# Altium PCB GPS.PcbDoc
Units mm, origin at the board's own origin, x right, y up, seen from the top; angles counter-clockwise.
Board outline 28 x 20 mm, 2 copper layers (Top Layer, Bottom Layer), stack 0.871 mm thick; 39 components, 32 nets, 142 pads, 260 vias.
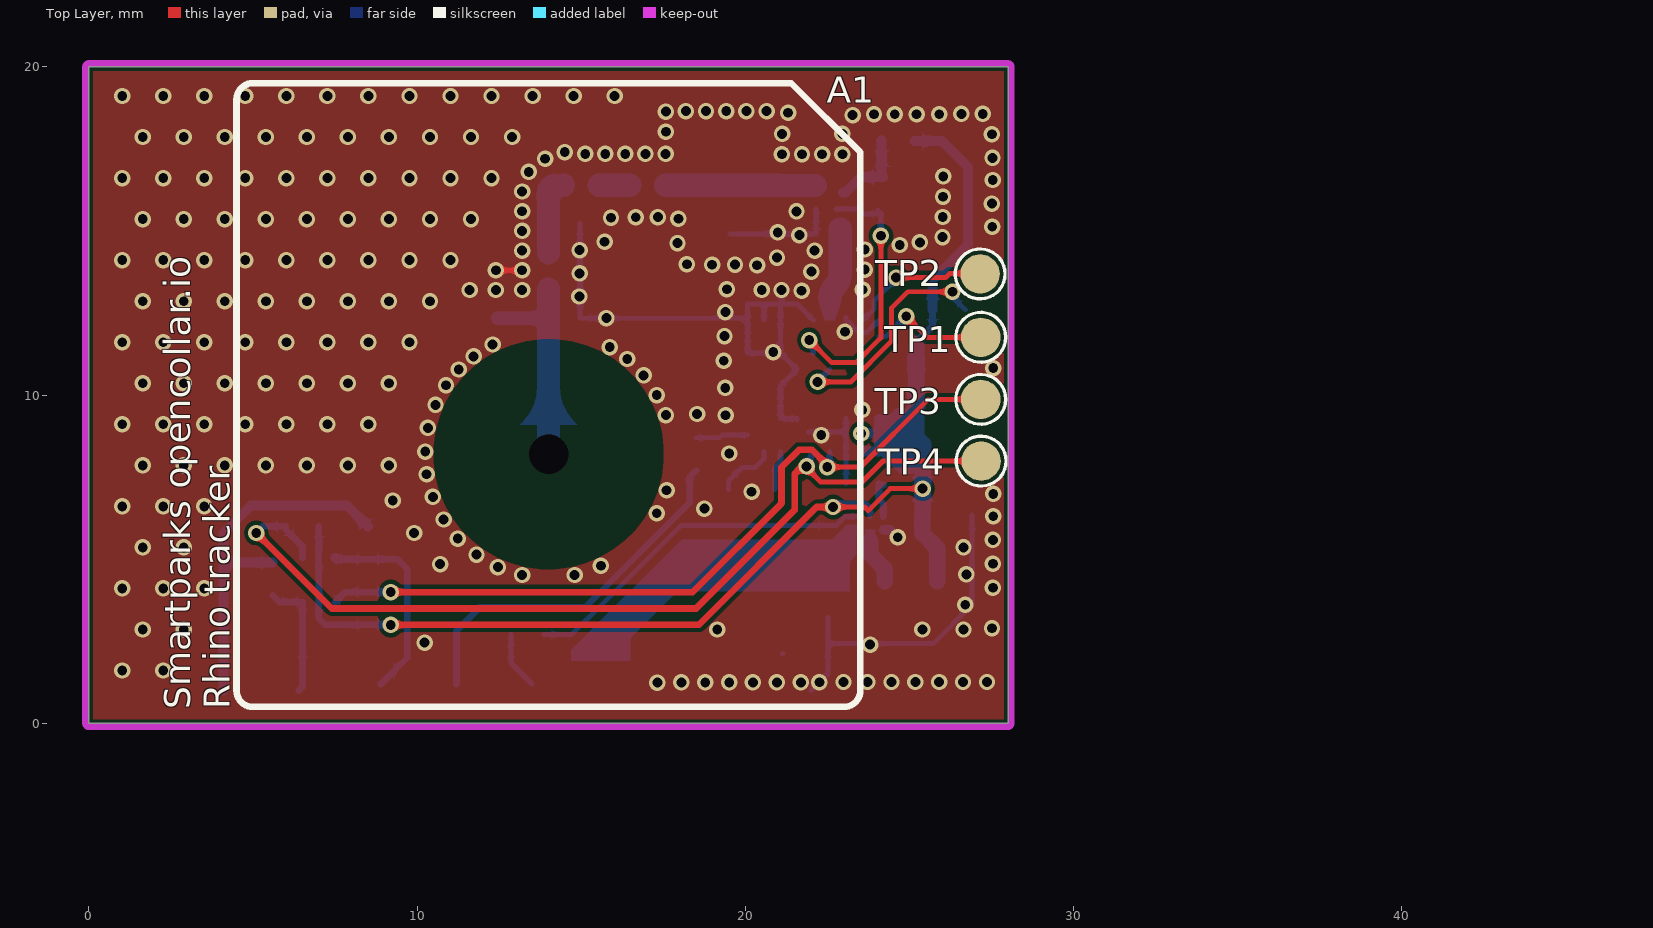
[diagram p0: Top Layer view]
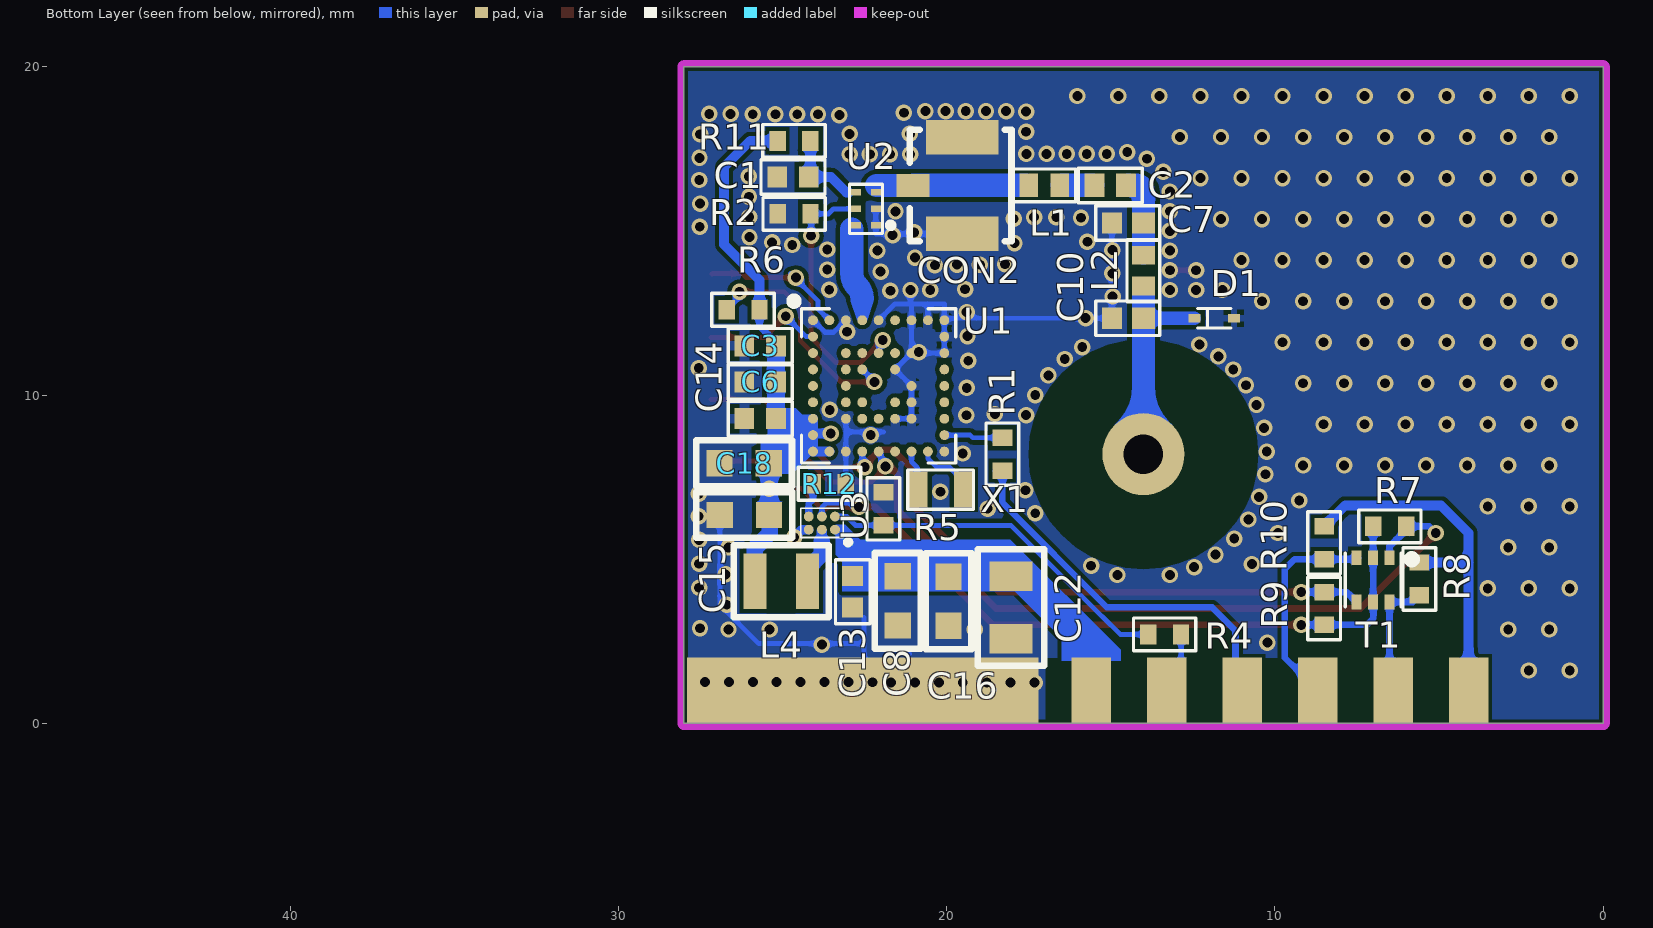
[diagram p1: Bottom Layer view, seen from below]

## Layer stack, top to bottom
Top Solder: solder mask 0.0102, Solder Resist, Dk 3.5
Top Layer: signal copper 0.0356
Dielectric 1: dielectric 0.8, FR-4, Dk 4.8
Bottom Layer: signal copper 0.0356
Bottom Solder: solder mask 0.0102, Solder Resist, Dk 3.5

## Board outline
0,0 0,20 28,20 28,0

## Design rules (kind name [scope] priority, off if disabled: settings)
Clearance Clearance_ANT [InComponent('A1')] p1: gap=2.24 ignorepadtopadclearanceinfootprint=TRUE
Clearance [All] p2: gap=0.127 ignorepadtopadclearanceinfootprint=FALSE
ComponentClearance ComponentClearance_CON [InComponent('CON1')] p1: gap=-100 collisioncheckmode=3 verticalgap=-100 showdistances=FALSE
ComponentClearance [All] p2: gap=0.254 collisioncheckmode=3 verticalgap=0.254 showdistances=FALSE
MinimumSolderMaskSliver [All] p1: minsoldermaskwidth=0.127
PlaneClearance [InComponent('A1')] p1: clearance=0.508
PolygonConnect [All] p1: thpad.connectstyle=Direct thpad.reliefconductorwidth=0.254 thpad.reliefentries=4 thpad.polygonreliefangle="90 Angle" thpad.airgapwidth=0.254 smdpad.connectstyle=Relief smdpad.reliefconductorwidth=0.3 smdpad.reliefentries=4 smdpad.polygonreliefangle="90 Angle" smdpad.airgapwidth=0.127 via.connectstyle=Direct via.reliefconductorwidth=0.254 via.reliefentries=4 via.polygonreliefangle="90 Angle" via.airgapwidth=0.254
RoutingVias [All] p1: holewidth=0.2 width=0.4 viastyle="Through Hole" minholewidth=0.2 minwidth=0.4 maxholewidth=1.5 maxwidth=2
SilkToSilkClearance [All] p1: silktosilkclearance=0
SilkToSolderMaskClearance [IsPad] p1: minsilkscreentomaskgap=0 clearancetoexposedcopper=TRUE
SolderMaskExpansion [All] p1: expansion=0.102
Width [All] p1: maxlimit=5 minlimit=0.127 preferedwidth=0.3
25 further rules are at their usual default settings.

## Classes and differential pairs
component class GPS_POWER: C8 C12 C13 C14 C15 C16 C18 L4 R4 R5 R12 U3
component class MAIN_GPS: R7 R8 R9 R10 T1
component class GPS: A1 C1 C2 C3 C6 C7 C10 CON2 D1 L1 L2 R1 R2 R6 R11 TP1 TP2 TP3 TP4 U1 U2 X1

## Components (designator, comment, footprint, x,y, rotation, side; value= is the part's Value field where it differs from the comment)
A1 "CGGP.18.2.A.02" CGGP.18.2.A.02 14,10 r180 top locked
C1 "33nF" CAP0402#1 24.681,16.642 r180 bottom
C2 "470pF" CAP0402#2 15.015,16.387 r180 bottom
C3 "1uF" CAP0402#1 25.68,11.5 r180 bottom
C6 "100nF" CAP0402#1 25.68,10.4 r180 bottom
C7 "?" CAP0402#3 14.484,15.24 r180 bottom
C8 "10uF" CAP0603 21.49,3.73 r90 bottom
C10 "?" CAP0402#3 14.484,12.34 r180 bottom
C12 "100uF" CAP0805 18.04,3.53 r90 bottom
C13 "100nF" CAP0402#1 22.86,4.01 r90 bottom
C14 "100nF" CAP0402#1 25.68,9.28 r180 bottom
C15 "22uF/4V" CAP0603 26.16,6.35 r180 bottom
C16 "10uF" CAP0603 19.94,3.72 r90 bottom
C18 "10uF" CAP0603 26.17,7.92 r180 bottom
CON2 "U.FL-R-SMT-1(10)" "ufl connector smd" 19.776,16.235 r90 bottom
D1 "ESD9R3.3ST5G" SOD-923 11.849,12.34 r0 bottom
L1 "6.8nH" IND0402 17.025,16.387 r180 bottom
L2 "?" IND0402 14.005,13.79 r270 bottom
L4 "2.2uH" IND2.3X1.7 25.04,4.326 r0 bottom
R1 "100R" RES0402 18.3,8.2 r90 bottom
R2 "100k" RES0402 24.646,15.519 r180 bottom
R4 "100R" RES0402 13.36,2.71 r0 bottom
R5 "1M" RES0402 21.925,6.534 r270 bottom
R6 "100k" RES0402 26.2,12.6 r180 bottom
R7 "100k" RES0402 6.5,6 r180 bottom
R8 "100k" RES0402 5.6,4.4 r90 bottom
R9 "100k" RES0402 8.5,3.5 r90 bottom
R10 "100k" RES0402 8.5,5.5 r90 bottom
R11 "0R" RES0402 24.648,17.742 r0 bottom
R12 "0R" RES0402 23.57,7.3 r180 bottom
T1 "NTZD3154NT1G" SOT-563 7.01,4.37 r0 bottom value=BSS123
TP1 "TestPoint" TestPoint:1.2x1.2mm 27.17,11.76 r180 top
TP2 "TestPoint" TestPoint:1.2x1.2mm 27.15,13.69 r180 top
TP3 "TestPoint" TestPoint:1.2x1.2mm 27.17,9.87 r90 top
TP4 "TestPoint" TestPoint:1.2x1.2mm 27.18,7.99 r90 top
U1 "Ublox ZOE-M8B" S-LGA51 22.07,10.28 r180 bottom
U2 "MAX2659" uDFN-6 22.456,15.672 r90 bottom
U3 "MAX38640AENT+" WLP-6 23.8,6.1 r0 bottom
X1 "9HT11-32.768KEZC-T" 9HT11 20.18,7.12 r0 bottom

## Footprints (in the part's own frame and the unit in brackets; to place one, negate y for a bottom-side part, rotate by r counter-clockwise, add the part's x,y. Pads: shape width x height; smd on the part's side, far side on the other; paste and mask are expansions set on the pad)
9HT11 [mm]
  rect 0.6x1.1 smd: 1(-0.7,0) 2(0.7,0)
  silkscreen extent -1,-0.6 1,0.6, body extent -1,-0.6 1,0.6, height 0.6
CAP0402#1 [mm] "Chip Capacitor, 2-Leads, Body 1.00x0.50mm, IPC Medium Density"
  rect 0.6x0.64 smd: 1(-0.48,0) 2(0.48,0)
  silkscreen extent -0.97,-0.53 0.97,0.53, body extent -0.55,-0.3 0.55,0.3, height 0.45
CAP0402#2 [mm] "Chip Capacitor, 2-Leads, Body 1.00x0.50mm, IPC Medium Density"
  rect 0.6x0.712 smd: 1(-0.48,0) 2(0.48,0)
  silkscreen extent -0.97,-0.53 0.97,0.53, body extent -0.55,-0.3 0.55,0.3, height 0.45
CAP0402#3 [mm] "Chip Capacitor, 2-Leads, Body 1.00x0.50mm, IPC Medium Density"
  rect 0.6x0.64 smd: 1(-0.48,0)
  rect 0.712x0.64 smd: 2(0.48,0)
  silkscreen extent -0.97,-0.53 0.97,0.53, body extent -0.55,-0.3 0.55,0.3, height 0.45
CAP0603 [mm]
  rect 0.8x0.8 smd: 1(-0.75,0) 2(0.75,0)
  silkscreen extent -1.46,-0.7 1.46,0.7, body extent -0.8,-0.4 0.8,0.4, height 0.9
CAP0805 [mm]
  rect 0.9x1.3 smd: 1(-0.95,0) 2(0.95,0)
  silkscreen extent -1.78,-1.02 1.78,1.02, body extent -1,-0.6 1,0.6, height 1.5
CGGP.18.2.A.02 [mm]
  round 0 / inner round 1.5 / far side round 2.5 hole 1.2: 1(-0.005,1.8)
  silkscreen extent -9.5,-9.5 9.5,9.5, body extent -9.5,-9.5 9.5,9.5, height 5.54
IND2.3X1.7 [mm]
  rect 0.7x1.7 smd: 1(-0.8,0) 2(0.8,0)
  silkscreen extent -1.45,-1.1 1.45,1.1, body extent -1,-0.8 1,0.8, height 0.95
IND0402 [mm] "Chip Inductor, 2-Leads, Body 1.00x0.50mm, IPC Medium Density"
  rect 0.57x0.712 smd: 1(-0.47,0) 2(0.47,0)
  silkscreen extent -0.95,-0.5 0.95,0.5, body extent -0.53,-0.28 0.53,0.28, height 0.55
RES0402 [mm] "Chip Resistor, 2-Leads, Body 1.00x0.50mm, IPC Medium Density"
  rect 0.5x0.6 smd: 1(-0.5,0) 2(0.5,0)
  silkscreen extent -0.95,-0.5 0.95,0.5, body extent -0.5,-0.25 0.5,0.25, height 0.35
S-LGA51 [mm]
  round 0.3 smd mask+0.05: A1(-2,2) A2(-1.5,2) A3(-1,2) A4(-0.5,2) A5(0,2) A6(0.5,2) A7(1,2) A8(1.5,2) A9(2,2) B1(-2,1.5) B9(2,1.5) C1(-2,1) C3(-1,1) C4(-0.5,1) C5(0,1) C6(0.5,1) C7(1,1) C9(2,1) D1(-2,0.5) D3(-1,0.5) D4(-0.5,0.5) D6(0.5,0.5) D9(2,0.5) E1(-2,0) E3(-1,0) E7(1,0) E9(2,0) F1(-2,-0.5) F3(-1,-0.5) F4(-0.5,-0.5) F6(0.5,-0.5) F7(1,-0.5) F9(2,-0.5) G1(-2,-1) G3(-1,-1) G4(-0.5,-1) G5(0,-1) G6(0.5,-1) G7(1,-1) G9(2,-1) H1(-2,-1.5) H9(2,-1.5) J1(-2,-2) J2(-1.5,-2) J3(-1,-2) J4(-0.5,-2) J5(0,-2) J6(0.5,-2) J7(1,-2) J8(1.5,-2) J9(2,-2)
  silkscreen extent -2.69,-2.35 2.35,2.69, body extent -2.25,-2.25 2.25,2.25, height 1.04
SOD-923 [mm]
  rect 0.36x0.25 smd: A(-0.6,0) K(0.6,0)
  silkscreen extent -0.5,-0.3 0.51,0.3, body extent -0.5,-0.3 0.5,0.3, height 0.4
SOT-563 [mm]
  rect 0.3x0.45 smd: 1(-0.5,-0.675) 2(0,-0.675) 3(0.5,-0.675) 4(0.5,0.675) 5(0,0.675) 6(-0.5,0.675)
  silkscreen extent -1.3,-0.81 0.85,0.82, body extent -0.8,-0.81 0.8,0.81, height 0.58
TestPoint:1.2x1.2mm [mm]
  round 1.2 smd paste-10 mask+0: 0(0,0)
  silkscreen extent -0.76,-0.76 0.76,0.76
uDFN-6 [mm]
  rect 0.2x0.3 smd: 1(-0.5,-0.3) 2(0,-0.3) 3(0.5,-0.3) 4(0.5,0.3) 5(0,0.3) 6(-0.5,0.3)
  silkscreen extent -0.75,-0.8 0.75,0.5, body extent -0.75,-0.5 0.75,0.5, height 0.75
"ufl connector smd" [mm]
  rect 0.712x1 smd: 1(0.15,1.248)
  rect 1.05x2.2 smd: 2(-1.325,-0.252) 2(1.625,-0.252)
  silkscreen extent -1.55,-1.75 1.85,1.35, body extent -1.55,-1.67 1.85,1.43, height 1.25
WLP-6 [mm] "WLP-6"
  round 0.3 smd mask+0.05: A1(-0.4,0.2) A2(0,0.2) A3(0.4,0.2) B1(-0.4,-0.2) B2(0,-0.2) B3(0.4,-0.2)
  silkscreen extent -0.86,-0.45 0.64,0.64, body extent -0.62,-0.42 0.62,0.42, height 1.27

## Part data
A1: library part "ANT - CGGP.18.2.A.02", "Antennas Passive GPS/GLONASS Patch Antenna", Manufacturer=Antenova, Manufacturer Part Number=SR42I010-R, Supplier Part Number 1=960-CGGP.18.2.A.02, ComponentLink1Description=Datasheet, ComponentLink1URL=D:\altium\Altium_Library\Passive\Datasheet\CGGP.18.2.A.02.pdf, Pricing 1="1 = 2.36000, 10 = 1.90000, 50 = 1.90000, 100 = 1.52000, 1000 = 1.07000, 10000 = 0.95900 (USD)", Stock 1=3154, Supplier 1=Mouser
C1: library part "C - 33pF/0402", "MULTICOMP         MC0402N330J160CT             SMD Multilayer Ceramic Capacitor, 0402 [1005 Metric], 33 pF, 16 V,  5%, C0G / NP0, MC Series                          New", Capacitance=33pF, Case Code (Imperial)=0402, Case Code (Metric)=1005, Dielectric=C0G, IRNAS Part No.=/, Manufacturer=Multicomp, Manufacturer Part Number=MC0402N330J160CT, Max Operating Temperature=125°C, Min Operating Temperature=-55°C, Supplier Part Number 1=1759384, Tolerance=5%, Voltage Rating=16V, ComponentLink1Description=http://www.farnell.com/datasheets/2117933.pdf, ComponentLink1URL=http://www.farnell.com/datasheets/2117933.pdf, ComponentLink2Description=http://www.farnell.com/datasheets/2117900.pdf, ComponentLink2URL=http://www.farnell.com/datasheets/2117900.pdf, Packaging="Cut Tape", Pricing 1="10=0.011, 100=0.009, 500=0.0069, 2500=0.0041 (EUR)", REACH SVHC="No SVHC", Stock 1=19597, Supplier 1=Farnell, Voltage Rating (DC)=16V
C2: library part "C - 470pF/0402", IRNAS Part No.=/, Manufacturer=Murata, Manufacturer Part Number=GRT155R71H471KE01D, Supplier Part Number 1=2672128, Pricing 1="10=0.0259, 100=0.0176, 500=0.0105, 2500=0.008, 5000=0.007, 10000=0.006, 50000=0.0041 (GBP)", Stock 1=11080, Supplier 1=Farnell
C3: library part "C - 1uF/0402", "CAP CER 1UF 10V 20% X5R 0402", Case/Package=0402, Case Code (Metric)=1005, Dielectric=X5R, IRNAS Part No.=/, Manufacturer=Murata, Manufacturer Part Number=GRM155R61A105ME15D, Max Operating Temperature=85°C, Min Operating Temperature=-55°C, Package Quantity=1, Supplier Part Number 1=1740588, Tolerance=20%, Voltage=10V, Capacitance=1uF, Case Code (Imperial)=0402, ComponentLink1Description=https://datasheet.ciiva.com/164/product-164665.pdf, ComponentLink1URL=https://datasheet.ciiva.com/164/product-164665.pdf, ComponentLink2Description=https://datasheet.ciiva.com/11616/product-11616508.pdf, ComponentLink2URL=https://datasheet.ciiva.com/11616/product-11616508.pdf, ComponentLink3Description=https://datasheet.ciiva.com/46418/1769893-46418047.pdf, ComponentLink3URL=https://datasheet.ciiva.com/46418/1769893-46418047.pdf, ComponentLink4Description=https://datasheet.ciiva.com/164/partnumbering-e-01-164666.pdf, ComponentLink4URL=https://datasheet.ciiva.com/164/partnumbering-e-01-164666.pdf, ComponentLink5Description=https://datasheet.ciiva.com/164/partnumbering-e-01-164667.pdf, ComponentLink5URL=https://datasheet.ciiva.com/164/partnumbering-e-01-164667.pdf, Depth=0.5mm, Height=0.5mm, Lead Free="Lead Free", Length=1mm, Mount="Surface Mount", Packaging="Tape and Reel", Pricing 1="10=0.0379, 100=0.0266, 500=0.0156, 2500=0.0098, 5000=0.0083 (EUR)", Radiation Hardening=No, REACH SVHC="No SVHC", Stock 1=0, Supplier 1=Farnell, Thickness=0.022inch, Voltage Rating=10V, Voltage Rating (DC)=10V, Width=0.02inch
C6 C13 C14: library part "C - 100nF/0402", "MULTICOMP         MC0402X104J160CT             SMD Multilayer Ceramic Capacitor, 0402 [1005 Metric], 0.1 F, 16 V,  5%, X5R, MC Series                          New", Case Code (Imperial)=0402, Case Code (Metric)=1005, Dielectric=X5R, IRNAS Part No.=/, Manufacturer=Multicomp, Manufacturer Part Number=MC0402X104J160CT, Max Operating Temperature=85°C, Min Operating Temperature=-55°C, Supplier Part Number 1=2627419, Tolerance=5%, Voltage Rating=16V, Capacitance=100nF, ComponentLink1Description=http://www.farnell.com/datasheets/2117933.pdf, ComponentLink1URL=http://www.farnell.com/datasheets/2117933.pdf, ComponentLink2Description=http://www.farnell.com/datasheets/2117900.pdf, ComponentLink2URL=http://www.farnell.com/datasheets/2117900.pdf, Packaging="Tape and Reel", Pricing 1="10=0.0139, 100=0.0108, 500=0.0076, 2500=0.0051, 5000=0.0038 (EUR)", REACH SVHC="No SVHC", Stock 1=3230, Supplier 1=Farnell, Voltage Rating (DC)=16V
C7 C10: library part "C - 1.8pF/0402", "Multilayer Ceramic Capacitors MLCC - SMD/SMT 50volts 1.8pF C0G", Capacitance=1.8pF, Case/Package=0402, Case Code (Metric)=1005, Dielectric Material=Ceramic, IRNAS Part No.=/, Manufacturer=KEMET, Manufacturer Part Number=C0402C189B5GACTU, Max Operating Temperature=125°C, Min Operating Temperature=-55°C, Supplier Part Number 1=2820847, Voltage Rating=50V, Case Code (Imperial)=0402, ComponentLink1Description=https://datasheet.ciiva.com/5413/kem-c1003-c0g-smd-5413366.pdf, ComponentLink1URL=https://datasheet.ciiva.com/5413/kem-c1003-c0g-smd-5413366.pdf, Lead Free="Lead Free", Packaging="Tape and Reel", Pricing 1="10=0.463, 100=0.248, 500=0.182, 2500=0.153, 5000=0.134, 10000=0.11, 50000=0.0961 (EUR)", Stock 1=8950, Supplier 1=Farnell, Termination=SMD/SMT, Voltage Rating (DC)=50V
C8 C16 C18: library part "C - 10uF/10V", "Cap Ceramic 10uF 10V X5R 10% SMD 0603 85C Paper T/R", Case/Package=0603, Case Code (Metric)=1608, Dielectric=X5R, IRNAS Part No.=/, Manufacturer=Samsung, Manufacturer Part Number=CL10A106KP8NNNC, Max Operating Temperature=85°C, Min Operating Temperature=-55°C, Package Quantity=1, Supplier Part Number 1=2456110, Tolerance=10%, Voltage Rating=10V, Capacitance=10uF, Case Code (Imperial)=0603, ComponentLink1Description=https://www.verical.com/server-webapp/html/getDatasheet?partID=359551, ComponentLink1URL=https://www.verical.com/server-webapp/html/getDatasheet?partID=359551, ComponentLink2Description=http://www1.futureelectronics.com/doc/SAMSUNG%20PASSIVE/CL05B104KQ5NNNC.pdf, ComponentLink2URL=http://www1.futureelectronics.com/doc/SAMSUNG%20PASSIVE/CL05B104KQ5NNNC.pdf, ComponentLink3Description=https://produktinfo.conrad.com/datenblaetter/450000-474999/457369-da-01-en-VS_KONDENSATOR_0603.pdf, ComponentLink3URL=https://produktinfo.conrad.com/datenblaetter/450000-474999/457369-da-01-en-VS_KONDENSATOR_0603.pdf, Contact Plating=Tin, Depth=0.8mm, Height=0.8mm, Lead Free="Lead Free", Length=1.6mm, Material=Ceramic, Mount="Surface Mount", Packaging="Tape and Reel", Pricing 1="1=0.36, 10=0.248, 100=0.1403, 500=0.099, 1000=0.08663 (USD)", Radiation Hardening=No, Stock 1=2844657, Supplier 1=Farnell, Thickness=0.035inch, Voltage Rating (DC)=10V, Width=0.031inch
C12: library part "C - 100uF/0805", "Multilayer Ceramic Capacitors MLCC - SMD/SMT 0805 100uF 4volts *Derate Voltage/Temp", Case/Package=0805, Case Code (Metric)=2012, Dielectric=X5R, Dielectric Material=Ceramic, IRNAS Part No.=/, Manufacturer=Murata, Manufacturer Part Number=GRM21BR60G107ME15L, Max Operating Temperature=85°C, Min Operating Temperature=-55°C, Package Quantity=3000, Supplier Part Number 1=2611937, Tolerance=20%, Voltage=4V, Capacitance=100uF, Case Code (Imperial)=0805, ComponentLink1Description=http://www.farnell.com/datasheets/2079181.pdf, ComponentLink1URL=http://www.farnell.com/datasheets/2079181.pdf, ComponentLink2Description=http://search.murata.co.jp/Ceramy/image/img/A01X/partnumbering_e_01.pdf, ComponentLink2URL=http://search.murata.co.jp/Ceramy/image/img/A01X/partnumbering_e_01.pdf, ComponentLink3Description=http://psearch.en.murata.com/capacitor/product/GRM21BR60G107ME15%23.pdf, ComponentLink3URL=http://psearch.en.murata.com/capacitor/product/GRM21BR60G107ME15%23.pdf, ComponentLink4Description=http://www.mouser.com/ds/2/281/c02e-2905.pdf, ComponentLink4URL=http://www.mouser.com/ds/2/281/c02e-2905.pdf, Depth=1.25mm, Dissipation Factor=0.1%, Height=1.25mm, Lead Free="Lead Free", Length=2mm, Mount="Surface Mount", Packaging="Tape and Reel", Pricing 1="5=0.775, 50=0.463, 250=0.405, 500=0.289, 1500=0.243, 3000=0.229, 15000=0.21 (GBP)", REACH SVHC="No SVHC", Stock 1=529, Supplier 1=Farnell, Termination=SMD/SMT, Thickness=0.057inch, Voltage Rating=4V, Voltage Rating (DC)=4V, Weight=0.000335oz, Width=0.049inch
C15: library part "C - 10uF/10V", "SMD Multilayer Ceramic Capacitor, 22 µF, 4 V, 0603 [1608 Metric], ± 20%, X5R, GRM Series", Capacitance=10uF, Case/Package=0603, Case Code (Metric)=1608, Dielectric=X5R, IRNAS Part No.=/, Manufacturer=Samsung, Manufacturer Part Number=GRM188R60G226MEA0D, Max Operating Temperature=85°C, Min Operating Temperature=-55°C, Package Quantity=1, Supplier Part Number 1=1907502, Tolerance=10%, Voltage Rating=10V, Case Code (Imperial)=0603, ComponentLink1Description=https://www.verical.com/server-webapp/html/getDatasheet?partID=359551, ComponentLink1URL=https://www.verical.com/server-webapp/html/getDatasheet?partID=359551, ComponentLink2Description=http://www1.futureelectronics.com/doc/SAMSUNG%20PASSIVE/CL05B104KQ5NNNC.pdf, ComponentLink2URL=http://www1.futureelectronics.com/doc/SAMSUNG%20PASSIVE/CL05B104KQ5NNNC.pdf, ComponentLink3Description=https://produktinfo.conrad.com/datenblaetter/450000-474999/457369-da-01-en-VS_KONDENSATOR_0603.pdf, ComponentLink3URL=https://produktinfo.conrad.com/datenblaetter/450000-474999/457369-da-01-en-VS_KONDENSATOR_0603.pdf, Contact Plating=Tin, Depth=0.8mm, Height=0.8mm, Lead Free="Lead Free", Length=1.6mm, Material=Ceramic, Mount="Surface Mount", Packaging="Tape and Reel", Pricing 1="1=0.36, 10=0.248, 100=0.1403, 500=0.099, 1000=0.08663 (USD)", Radiation Hardening=No, Stock 1=2844657, Supplier 1=Farnell, Thickness=0.035inch, Voltage Rating (DC)=10V, Width=0.031inch
CON2: "RF / Coaxial Connector, U.FL Coaxial, Straight Jack, Surface Mount Vertical, 50 ohm, Brass", Dielectric Material="Liquid Crystal Polymer (LCP)", Frequency - Max=6GHz, Housing Color=Beige, Manufacturer=Hirose, Operating Temperature="-40°C ~ 90°C", Standard Package=2,500, Supplier Part Number 1=1688077, Voltage Rating=-, Body Finish=Silver, Body Material="Phosphor Bronze", Cable Group=-, Category="Connectors, Interconnects", Center Contact Material=Brass, Center Contact Plating=Gold, ComponentLink1Description=http://www.farnell.com/datasheets/91524.pdf, ComponentLink1URL=http://www.farnell.com/datasheets/91524.pdf, ComponentLink2Description=http://uk.rs-online.com/webdocs/1363/0900766b81363563.pdf, ComponentLink2URL=http://uk.rs-online.com/webdocs/1363/0900766b81363563.pdf, ComponentLink3Description=http://www.farnell.com/datasheets/1947917.pdf, ComponentLink3URL=http://www.farnell.com/datasheets/1947917.pdf, Connector Style="U.FL, Ultra Miniature Coaxial", Connector Type="Receptacle, Male Pin", Contact Termination=Solder, Family="Coaxial Connectors (RF)", Fastening Type=Snap-On, Featured Product="U.FL Series Connectors", Features=-, Impedance="50 Ohm", Ingress Protection=-, Manufacturer Part Number=U.FL-R-SMT-1(10), Mounting Type="Surface Mount", Online Catalog="UMCC (Ultra Miniature Coax Connectors), U.FL Series", Other Names="H11891TR  Q5400621  U.FL-R-SMT-1 10  U.FL-R-SMT-1(10)-ND  UFLRSMT110", Packaging="Tape & Reel (TR)", Series=U.FL, Shield Termination=Solder, Stock 1=0, Supplier 1=Farnell
D1: library part "D_TVS - ESD9R3.3ST5G", "TVS Diode, ESD9R Series, Unidirectional, 3.3 V, 7.8 V", Diode Case Style=SOD-123, Forward Current If(AV)=300, Forward Surge Current Ifsm Max=2, Forward Voltage VF Max=1.25, Manufacturer="DIODES INC.", Manufacturer Part Number=1N4148W-7-F., Operating Temperature Max=150, Operating Temperature Min=-65, Operating Temperature Range="-65°C to +150°C<!--FANDB--><div class=\"features-and-benefits-container\"><div class=\"features-and-benefits-description\"><span class=\"features-benefits-value\">The 1N4148W-7-F is a surface mount fast Switching Diode with moulded plastic case. Suitable for general purpose switching applications.</span></div><div class=\"features-and-benefits-list\"><ul class=\"features-and-benefits-list-list\"><li class=\"features-and-benefits-list-item\">Fast Switching Speed</li><li class=\"features-and-benefits-list-item\">2", Repetitive Reverse Voltage Vrrm Max=100, Supplier Part Number 1=2101835, Automotive Qualification Standard=-, ComponentLink1Description=Datasheet, ComponentLink1URL=D:\altium\Altium_Library\Active\Datasheet\ESD9R33ST5G.pdf, Diode Configuration=Single, Diode Type=Switching, MSL="MSL 1 - Unlimited", No. of Pins=2, Packaging="Cut Tape", Pricing 1="1=0.136, 25=0.132, 100=0.0465, 500=0.042, 1000=0.024, 3000=0.021, 9000=0.017, 30000=0.0149 (GBP)", Product Range="1N4148 Series", Reverse Recovery Time trr Max=4, RoHS=YES, Stock 1=157320, Supplier 1=Farnell, SVHC="No SVHC (17-Dec-2015)"
L1: library part "L - 33nH/0402", "FIXED IND 33NH 200MA 580 MOHM", Case/Package=0402, Case Code (Metric)=1005, Current Rating=200mA, DC Resistance (DCR)=580mR, Inductance=33nh, IRNAS Part No.=/, Manufacturer=Murata, Manufacturer Part Number=LQG15HS33NJ02D, Max Operating Temperature=125°C, Min Operating Temperature=-55°C, Package Quantity=10000, Self Resonant Frequency=1.6GHz, Supplier Part Number 1=1711736, Test Frequency=100MHz, Tolerance=5%, Case Code (Imperial)=0402, ComponentLink1Description=https://datasheet.ciiva.com/11799/0900766b8090d685-11799024.pdf, ComponentLink1URL=https://datasheet.ciiva.com/11799/0900766b8090d685-11799024.pdf, ComponentLink2Description=https://datasheet.ciiva.com/1038/l0075s0083lqg15hs-1038140.pdf, ComponentLink2URL=https://datasheet.ciiva.com/1038/l0075s0083lqg15hs-1038140.pdf, ComponentLink3Description=https://datasheet.ciiva.com/1038/l0075s0083lqg15hs-1038141.pdf, ComponentLink3URL=https://datasheet.ciiva.com/1038/l0075s0083lqg15hs-1038141.pdf, ComponentLink4Description=https://datasheet.ciiva.com/16207/l0075s0083lqg15hs-16207871.pdf, ComponentLink4URL=https://datasheet.ciiva.com/16207/l0075s0083lqg15hs-16207871.pdf, ComponentLink5Description=https://datasheet.ciiva.com/1038/l0075s0083lqg15hs-1038139.pdf, ComponentLink5URL=https://datasheet.ciiva.com/1038/l0075s0083lqg15hs-1038139.pdf, ComponentLink6Description=https://datasheet.ciiva.com/17279/l0075s0083lqg15hs-17279253.pdf, ComponentLink6URL=https://datasheet.ciiva.com/17279/l0075s0083lqg15hs-17279253.pdf, ComponentLink7Description=https://datasheet.ciiva.com/4977/o05e-4977560.pdf, ComponentLink7URL=https://datasheet.ciiva.com/4977/o05e-4977560.pdf, ComponentLink8Description=https://datasheet.ciiva.com/8510/l0075s0083lqg15hs-8510857.pdf, ComponentLink8URL=https://datasheet.ciiva.com/8510/l0075s0083lqg15hs-8510857.pdf, Core Material=Air, DC Current=200mA, Depth=0.55mm, Height=0.5mm, Height - Seated (Max)=0.022inch, Lead Free="Lead Free", Length=1mm, Max DC Current=200mA, Military Standard=Not, Mount="Surface Mount", Packaging="Tape and Reel", Pricing 1="1=0.1, 10=0.061, 100=0.0404, 500=0.0337, 1000=0.0283, 2500=0.0242 (USD)", Q Factor=8, Radiation Hardening=No, Shielding=Unshielded, Stock 1=168013, Supplier 1=Farnell, Termination=SMD/SMT, Width=0.5mm
L2: library part "L - 4.3nH/0402", "Inductor RF Chip Multi-Layer 4.3nH 0.3nH 100MHz 8Q-Factor Air 300mA 210mOhm DCR 0402 Paper T/R", Case/Package=0402, Case Code (Metric)=1005, Current=300mA, DC Resistance (DCR)=210mR, Inductance=4.3nh, IRNAS Part No.=/, Manufacturer=Murata, Manufacturer Part Number=LQG15HN4N3S02D, Max Operating Temperature=125°C, Min Operating Temperature=-55°C, Package Quantity=10000, Self Resonant Frequency=6GHz, Supplier Part Number 1=490-6563-1-ND, Test Frequency=100MHz, Case Code (Imperial)=0402, ComponentLink1Description=http://uk.rs-online.com/webdocs/0f10/0900766b80f10808.pdf?src-supplier=RSComponents, ComponentLink1URL=http://uk.rs-online.com/webdocs/0f10/0900766b80f10808.pdf?src-supplier=RSComponents, ComponentLink2Description=http://search.murata.co.jp/Ceramy/image/img/PDF/ENG/L0075S0083LQG15HN.pdf?src-supplier=Avnet, ComponentLink2URL=http://search.murata.co.jp/Ceramy/image/img/PDF/ENG/L0075S0083LQG15HN.pdf?src-supplier=Avnet, ComponentLink3Description=http://www.farnell.com/datasheets/66026.pdf?src-supplier=Element14, ComponentLink3URL=http://www.farnell.com/datasheets/66026.pdf?src-supplier=Element14, ComponentLink4Description=https://www.verical.com/server-webapp/html/getDatasheet?partID=31252&src-supplier=Verical, ComponentLink4URL=https://www.verical.com/server-webapp/html/getDatasheet?partID=31252&src-supplier=Verical, ComponentLink5Description=http://search.murata.co.jp/Ceramy/image/img/PDF/ENG/L0075S0083LQG15HN.pdf?src-supplier=Avnet+Europe, ComponentLink5URL=http://search.murata.co.jp/Ceramy/image/img/PDF/ENG/L0075S0083LQG15HN.pdf?src-supplier=Avnet+Europe, ComponentLink6Description=https://search.murata.co.jp/Ceramy/image/img/P02/partnumberingAT_LQ3E.pdf?src-supplier=Digi-Key, ComponentLink6URL=https://search.murata.co.jp/Ceramy/image/img/P02/partnumberingAT_LQ3E.pdf?src-supplier=Digi-Key, Core Material=Air, Current Rating=300mA, DC Current=300mA, Depth=0.55mm, Height=0.5mm, Height - Seated (Max)=0.022inch, Lead Free="Lead Free", Length=1.05mm, Max DC Current=300mA, Military Standard=Not, Mount="Surface Mount", Packaging="Tape and Reel", Pricing 1="1 = 0.10000, 10 = 0.06100, 100 = 0.04040, 500 = 0.03366, 1000 = 0.02827, 2500 = 0.02423 (USD)", Q Factor=8, Radiation Hardening=No, REACH SVHC="No SVHC", RoHS=Yes, Shielding=Unshielded, Stock 1=3502, Supplier 1=Digi-Key, Termination=SMD/SMT, Width=0.02inch
L4: library part "L - 2.2 uH 900mA", IRNAS Part No.=/, Manufacturer=Bourns, Manufacturer Part Number=SRN2009T-2R2M, Supplier Part Number 1=2808272, Pricing 1="5=0.308, 50=0.201, 250=0.163, 500=0.145, 1000=0.133, 2000=0.124, 10000=0.116 (EUR)", Stock 1=1975, Supplier 1=Farnell
R1 R4: library part "R - 100R/0402", "MULTICOMP         MCMR04X1000FTL            SMD Chip Resistor, Ceramic, MCMR Series, 100 ohm, 50 V, 0402 [1005 Metric], 62.5 mW,  1%", Case/Package=0402, Case Code (Metric)=1005, IRNAS Part No.=/, Manufacturer=Multicomp, Manufacturer Part Number=MCMR04X1000FTL, Power Rating=62.5mW, Supplier Part Number 1=2072515, Temperature Coefficient=100ppm/°C, Tolerance=1%, Voltage Rating=50V, Case Code (Imperial)=0402, ComponentLink1Description=https://datasheet.ciiva.com/28692/1716705-28692087.pdf, ComponentLink1URL=https://datasheet.ciiva.com/28692/1716705-28692087.pdf, ComponentLink2Description=https://datasheet.ciiva.com/22708/1716705-22708156.pdf, ComponentLink2URL=https://datasheet.ciiva.com/22708/1716705-22708156.pdf, Composition=Ceramic, Packaging="Cut Tape", Pricing 1="10=0.0071, 100=0.0042, 500=0.003, 2500=0.0024, 5000=0.0019 (GBP)", REACH SVHC="No SVHC", Resistance=100R, Stock 1=62365, Supplier 1=Farnell, Voltage Rating (DC)=50V
R2 R6 R7 R8 R9 R10: library part "R - 100k/0402", "MULTICOMP   MCWR04X1003FTL   RES, THICK FILM, 100KOHM, 1%, 0.0625W", Case/Package=0402, Case Code (Metric)=1005, IRNAS Part No.=I-100013, Manufacturer=Multicomp, Manufacturer Part Number=MCWR04X1003FTL, Power Rating=62.5mW, Resistance=100kR, Supplier Part Number 1=2447094, Temperature Coefficient=100ppm/°C, Tolerance=1%, Voltage Rating=50V, Case Code (Imperial)=0402, ComponentLink1Description=https://datasheet.ciiva.com/46386/1849611-46386524.pdf, ComponentLink1URL=https://datasheet.ciiva.com/46386/1849611-46386524.pdf, Composition="Thick Film", Mount="Surface Mount", Packaging="Cut Tape", Pricing 1="10=0.0029, 100=0.0017, 500=0.0012, 2500=0.001, 5000=0.0008 (EUR)", REACH SVHC="No SVHC", Stock 1=161188, Supplier 1=Farnell, Voltage Rating (DC)=50V
R5: library part "R - 1M/0402", "MCMR04X1004FTL RES, 1M, 1%, 0.0625W, 0402, THICK FILM", IRNAS Part No.=I-100012, Manufacturer=MULTICOMP, Manufacturer Part Number=MC0063W060311M, Operating Temperature Max=155, Operating Temperature Min=-55, Operating Temperature Range="-55°C to +155", Power Rating=63, Resistance=1, Resistance Tolerance="± 1%", Resistor Case Style="0603 [1608 Metric]", Resistor Element Material="Thick Film", Resistor Mounting="Surface Mount Device", Supplier Part Number 1=9330410, Temperature Coeff. +=100, Temperature Coefficient="± 100", Tolerance +=1%, Voltage Rating=50, Voltage Rating V DC="50V<!--FANDB--><div class=\"features-and-benefits-container\"><div class=\"features-and-benefits-description\"><span class=\"features-benefits-value\">The Multicomp MC series current sense resistors are thick film chip resistors. The resistance range includes E96 and E24 decade values from 1ohm to 10Mohm.</span></div><div class=\"features-and-benefits-list\"><ul class=\"features-and-benefits-list-list\"><li class=\"features-and-benefits-list-item\">EIA 0402, 0603, 0805, 1206 chip sizes available</li><li class=\"features-and-benefits-list-item\">Small size and low weight</li><li class=\"features-and-benefits-list-item\">Suitable for both wave and reflow soldering</li><li class=\"features-and-benefits-list-item\">Reduction of assembly costs</li><li class=\"features-and-benefits-list-item\">Maximum working voltage of 50V(0402, 0603), 150V(0805), 200V(1206)</li><li class=\"features-and-benefits-list-item\">Available in ±1%, ±2% and ±5% tolerance</li><li class=\"features-and-benefits-list-item\">Power rating of 62.5mW, 100mW and 125mW</li><li class=\"features-and-benefits-list-item\">±400ppm/°C(1ohm to 10ohm), ±200ppm/°C(11ohm to 100ohm), ±100", Automotive Qualification Standard=-, ComponentLink1Description=http://www.farnell.com/datasheets/1788326.pdf, ComponentLink1URL=http://www.farnell.com/datasheets/1788326.pdf, ComponentLink2Description=http://www.farnell.com/cad/1558928.zip, ComponentLink2URL=http://www.farnell.com/cad/1558928.zip, External Depth=0.45, External Length / Height=1.6, External Width=0.8, No. of Pins=2, Packaging="Cut Tape", Pricing 1="10=0.0011, 100=0.001, 500=0.0009, 1000=0.0008, 2500=0.0007 (GBP)", Product Range="MC Series", Reel Quantity=5000, RoHS=Y-EX, Stock 1=333415, Supplier 1=Farnell, SVHC="No SVHC (17-Dec-2015)", Tape Width=8, Temperature Coeff. -=100, Tolerance -=1%
R11 R12: library part "R - 0R/0402", "RESISTOR, 0402, 0R, ANTI SULFURATION", Case/Package=0402, Case Code (Metric)=1005, IRNAS Part No.=I-100016, Manufacturer=Multicomp, Manufacturer Part Number=MCMR04X000PTL, Power Rating=62.5mW, Resistance=0mR, Supplier Part Number 1=2072513, Temperature Coefficient=400ppm/°C, Voltage Rating=50V, Case Code (Imperial)=0402, ComponentLink1Description=https://datasheet.ciiva.com/7776/1716705-7776974.pdf, ComponentLink1URL=https://datasheet.ciiva.com/7776/1716705-7776974.pdf, ComponentLink2Description=https://datasheet.ciiva.com/28677/1716705-28677161.pdf, ComponentLink2URL=https://datasheet.ciiva.com/28677/1716705-28677161.pdf, Composition=Ceramic, Packaging="Cut Tape", Pricing 1="10=0.0057, 100=0.0034, 500=0.0024, 2500=0.0019, 5000=0.0015 (EUR)", REACH SVHC="No SVHC", Stock 1=0, Supplier 1=Farnell, Voltage Rating (DC)=50V
T1: library part "T_M - NTZD3154NT1G", "Dual MOSFET, Dual N Channel, 540 mA, 20 V, 0.4 ohm, 4.5 V, 1 V", Supplier Part Number 1=2533209, Author="Ciril Golob", ComponentLink1Description=Datasheet, ComponentLink1URL=c:\ELRADSVN\Altium_Library\Libraries\Active\Datasheet\BSS123.pdf, ComponentLink2Description="Datasheet www", ComponentLink2URL=http://www.onsemi.com/pub/Collateral/BSS123-D.PDF, Date=11.07.2018, ELRAD Id sifra / ELRAD Id No=597778, FIT=0.44, Komp / Device=SMD, Opis / Description="MOSFET BSS123       /N-Channel", Supplier 1=Farnell, Velikost / Size=SOT23
TP1 TP2 TP3 TP4: "TEST POINT ROUND SMD", ComponentLink1Description=Datasheet, FIT=0.94, Komp / Device=SMD
U1: library part "RF - UBLOX-ZOE-M8B", "ZOE-M8 RF Receiver BeiDou, Galileo, GLONASS, GNSS, GPS -160dBm", Manufacturer=u-blox, Manufacturer Part Number=MAX-M8Q-0, Supplier Part Number 1=672-1063-1-ND, Stock 1=10805, Supplier 1=Digi-Key
U2: library part "RF - MAX2659", "RF Amplifier, GPS / GNSS, 20.5 dB Gain / 0.8 dB Noise, 1575.42 MHz, 1.6 V to 3.3 V Supply", Manufacturer=u-blox, Manufacturer Part Number=MAX-M8Q-0, Supplier Part Number 1=2800966, ComponentLink1Description=Datasheet, ComponentLink1URL=D:\altium\Altium_Library\Active\Datasheet\MAX2659.pdf, Stock 1=10805, Supplier 1=Farnell, Supplier 2=Mouser, Supplier Part Number 2=700-MAX2659ELT+T
U3: library part "V_SW - MAX38640AENT+", "Switching Voltage Regulators Tiny 300nA nanoPower Buck converters in uDFN and WLP pacakges", DC / DC Converter IC Case=TO-263, Input Voltage Max=45, Input Voltage Min=4.5, Manufacturer=ROHM, Manufacturer Part Number=BD70522GUL, Operating Temperature Max=125, Output Current=3, Output Voltage Max=37, Output Voltage Min=1.23, Supplier Part Number 1=700-MAX38640AENT+, Switching Frequency=150, Automotive Qualification Standard=-, ComponentLink1Description=Datasheet, ComponentLink1URL=https://eu.mouser.com/datasheet/2/256/MAX38640A-MAX38643B-1516623.pdf, MSL="MSL 1 - Unlimited", No. of Outputs=1, No. of Pins=5, Packaging=Each, Product Range=-, RoHS=YES, Supplier 1=Mouser, SVHC="No SVHC (12-Jan-2017", Topology="Buck (Step Down)"
X1: library part "X - 9HT11-32.768KEZC-T", "Crystal, 32.768 kHz, SMD, 2mm x 1.2mm, 9 pF, 10 ppm, 9HT11 Series", Case/Package=217, Frequency=32.8kHz, IRNAS Part No.=/, Load Capacitance=12.5pF, Manufacturer=IQD, Manufacturer Part Number=LFXTAL009678, Max Operating Temperature=85°C, Min Operating Temperature=-40°C, Supplier Part Number 1=2819312, ComponentLink1Description=Datasheet, ComponentLink1URL=http://www.farnell.com/datasheets/1750031.pdf?_ga=2.80970644.2249963.1562564392-1373726713.1554121096&_gac=1.50020820.1562763802.CjwKCAjwmZbpBRAGEiwADrmVXm8xT8OHDZvJe8qZIQyyGmIuiUD-TEITatw0hIdDkyBwIXXCH7oneRoCl7cQAvD_BwE, Number of Pins=2, Pricing 1="5=0.283, 50=0.203, 250=0.169, 500=0.163, 1500=0.157, 3000=0.152, 15000=0.146 (EUR)", REACH SVHC="No SVHC", Stock 1=15609, Supplier 1=Farnell

## Free pads (board coordinates)
  rect 10.7x2 smd far side: 1(22.551,1)
  rect 1.2x2 smd far side: 2(15.6,1) 3(13.3,1) 4(11,1) 5(8.7,1) 6(6.4,1) 7(4.1,1)

## Via types
v1: diameter 0.5, hole 0.3, Top Layer to Bottom Layer, tented both sides, 260 vias

## Nets (pads, with @x,y where several pads share a name; then routed paths per layer and width w, separated by ;. In a path a pad name is that pad's centre, name@x,y a point inside that pad or via, vN(x,y) a via of type N, cw(c..) or ccw(c..) an arc to the next point about the centre after c; other vN are vias at no path point)
+1.8V: C3.2 C6.2 C14.2 C15.2 C18.2 L4.2 R6.2 R7.1 R9.1 R11.2 T1.2 T1.5 U1.G1 U1.H1 U1.J1 U1.J2 U3.B2 | length 42.6
  Top Layer w0.152: v1(22.67,6.59) 23.63,6.59 23.74,6.48 24.41,7.15 v1(25.4,7.15)
  Top Layer w0.2: v1(9.2,3) 18.578,3 22.168,6.59 v1(22.67,6.59)
  Bottom Layer w0.152: v1@22.53,6.48 22.64,6.59 v1@22.648,6.59 ; v1@22.538,6.48 v1@22.648,6.59 ; U3.B2 23.8,6.58 23.66,6.72 22.8,6.72 v1(22.67,6.59) v1@22.648,6.59
  Bottom Layer w0.2: R7.1 7.01,5.99 T1.2 T1.5 7,3.685 7,3.2 7.2,3 R9.1 v1(9.2,3) ; C3.2 25.2,11.6 25.7,12.1 R6.2
  Bottom Layer w0.3: v1(23.53,8.83) 24.02,8.83 U1.H1 ; U1.J2 U1.J1 U1.H1 ; U1.G1 U1.H1 ; R11.2 25.983,17.742 26.784,16.941 26.784,14.592 25.7,13.508 R6.2
  Bottom Layer w0.5: C3.2 C6.2 C14.2 25.2,8.72 25.42,8.5 C18.2 25.4,7.9 v1(25.4,7.15) 25.4,6.36 C15.2 25.39,6.33 25.39,5.79 25.84,5.34 L4.2
+2.5V: pad.7 R8.2 R10.2 | length 11.3
  Bottom Layer w0.3: pad.7 4.1,4.9 ; R8.2 4.1,4.9 ; R10.2 7.86,6.64 4.939,6.64 4.1,5.801 4.1,4.9
GND: C1.1 C3.1 C6.1 C7.1 C8.1 C10.1 C12.1 C13.1 C14.1 C15.1 C16.1 C18.1 CON2.2 D1.A pad.1 R2.1 R5.1 R12.2 U1.A1 U1.A3 U1.A5 U1.A7 U1.A8 U1.A9 U1.B9 U1.C7 U1.C9 U1.D6 U1.E7 U1.F7 U1.G3 U1.G6 U1.G7 U1.J3 U1.J9 U2.1 U2.2 U3.A3 | length 37.4
  Top Layer w0.152: v1(12.4,13.8) v1(13.2,13.8)
  Bottom Layer w0.152: v1(12.4,13.8) v1@12.43,13.77 ; C7.1 C10.1 20.01,12.34 U1.A9 ; CON2.2@19.524,14.91 22.156,14.91 U2.1 U2.2 ; U1.A8 20.57,12.78 ; v1@21.1,13.1 21.1,12.782 ; 21.12,12.802 21.1,12.782 ; 21.13,2.12 21.14,2.13 ; U1.G6@21.57,9.24 U1.G6 U1.G7 U1.F7 U1.E7 U1.D6 U1.C7 ; 21.93,8.88 23.07,8.88 ; pad.1@22,1 v1(22.255,1.255) 22.51,1.51 22.51,2.43 ; U1.A5 21.57,12.78 21.098,12.78 ; 22.51,3.23 22.51,2.43 ; R12.2 U1.J3 23.07,8.88 ; U1.G3 23.07,8.88 ; U1.A3@23.07,12.365 U1.A3 23.44,11.91 23.7,11.91 U1.A1 ; C15.1 26.91,3.62 25.72,2.43 22.51,2.43 ; U1.A9 U1.B9 U1.C9 U1.C7 ; U1.A9 20.07,12.78 20.57,12.78 ; 20.57,12.78 21.098,12.78 ; U1.C7 U1.A7 21.07,12.752 21.098,12.78 ; 21.098,12.78 21.1,12.782
  Bottom Layer w0.3: U3.A3 24.41,5.9 v1(24.64,5.67)
  other v1: 17.32,1.24 18.05,1.25 18.78,1.25 19.51,1.25 20.23,1.25 20.96,1.25 21.69,1.25 22.99,1.26 23.72,1.26 24.45,1.26 25.18,1.26 25.9,1.26 26.63,1.26 27.36,1.26 1.018,1.61 2.268,1.61 23.8,2.4 10.23,2.46 1.643,2.86 2.893,2.86 19.143,2.86 25.393,2.86 26.643,2.86 27.512,2.897 26.697,3.615 1.018,4.11 2.268,4.11 3.518,4.11 27.54,4.13 13.2,4.52 14.8,4.52 26.732,4.536 12.46,4.76 15.6,4.8 10.7,4.85 27.54,4.86 11.81,5.14 1.643,5.36 2.893,5.36 26.643,5.36 27.54,5.59 11.24,5.63 9.91,5.8 10.81,6.21 27.55,6.31 17.3,6.4 18.75,6.542 1.018,6.61 2.268,6.61 3.518,6.61 9.26,6.79 10.48,6.9 27.55,6.99 20.188,7.054 17.6,7.1 10.29,7.59 1.643,7.86 2.893,7.86 4.143,7.86 5.393,7.86 6.643,7.86 7.893,7.86 9.143,7.86 19.51,8.22 10.25,8.28 22.31,8.78 10.33,9 1.018,9.11 2.268,9.11 3.518,9.11 4.768,9.11 6.018,9.11 7.268,9.11 8.518,9.11 19.398,9.384 17.58,9.39 18.529,9.424 23.56,9.55 10.56,9.7 17.3,10 19.387,10.22 10.88,10.3 1.643,10.36 2.893,10.36 4.143,10.36 5.393,10.36 6.643,10.36 7.893,10.36 9.143,10.36 16.9,10.6 11.27,10.78 27.55,10.82 19.341,11.044 16.4,11.1 11.72,11.18 20.85,11.31 15.87,11.46 12.3,11.54 1.018,11.61 2.268,11.61 3.518,11.61 4.768,11.61 6.018,11.61 7.268,11.61 8.518,11.61 9.768,11.61 19.364,11.794 23.03,11.93 15.766,12.344 19.393,12.528 1.643,12.86 2.893,12.86 4.143,12.86 5.393,12.86 6.643,12.86 7.893,12.86 9.143,12.86 10.393,12.86 14.943,13.002 21.714,13.18 11.6,13.2 12.4,13.2 13.2,13.2 19.438,13.221 20.5,13.2 21.1,13.2 23.574,13.211 14.95,13.708 22.012,13.762 23.637,13.823 20.356,13.955 18.986,13.967 19.685,13.975 18.219,13.985 1.018,14.11 2.268,14.11 3.518,14.11 4.768,14.11 6.018,14.11 7.268,14.11 8.518,14.11 9.768,14.11 11.018,14.11 20.963,14.188 13.2,14.4 14.95,14.414 22.111,14.402 23.637,14.435 24.704,14.572 17.932,14.63 15.712,14.67 25.316,14.651 26.005,14.813 21.646,14.874 20.988,14.956 13.2,15 27.518,15.125 1.643,15.36 2.893,15.36 4.143,15.36 5.393,15.36 6.643,15.36 7.893,15.36 9.143,15.36 10.393,15.36 11.643,15.36 17.96,15.372 15.908,15.403 16.66,15.415 17.335,15.42 26.012,15.425 13.2,15.6 21.557,15.593 27.51,15.834 26.02,16.043 13.2,16.2 27.536,16.552 1.018,16.61 2.268,16.61 3.518,16.61 4.768,16.61 6.018,16.61 7.268,16.61 8.518,16.61 9.768,16.61 11.018,16.61 12.268,16.61 26.027,16.662 13.4,16.8 13.9,17.2 27.527,17.225 21.112,17.335 21.725,17.335 22.337,17.335 22.957,17.335 15.123,17.346 15.733,17.346 16.342,17.346 16.954,17.346 17.572,17.346 14.5,17.4 1.643,17.86 2.893,17.86 4.143,17.86 5.393,17.86 6.643,17.86 7.893,17.86 9.143,17.86 10.393,17.86 11.643,17.86 12.893,17.86 27.51,17.943 21.12,17.955 22.957,17.955 17.579,18.019 23.266,18.527 23.917,18.555 24.549,18.555 25.217,18.555 25.905,18.555 26.581,18.563 27.229,18.563 21.3,18.6 17.579,18.636 18.189,18.651 18.801,18.651 19.418,18.651 20.03,18.651 20.648,18.651 1.018,19.11 2.268,19.11 3.518,19.11 4.768,19.11 6.018,19.11 7.268,19.11 8.518,19.11 9.768,19.11 11.018,19.11 12.268,19.11 13.518,19.11 14.768,19.11 16.018,19.11
GPS_EN: pad.3 R4.1 | length 1.8
  Bottom Layer w0.152: R4.1 12.86,1.84 pad.3@13.5,1.2
NetA1_1: A1.1 C10.2 D1.K L2.2 | length 6.6
  Bottom Layer w0.4: D1.K C10.2
  Bottom Layer w0.712: A1.1 L2.2@14.005,13.23
NetC1_2: C1.2 R11.1 U2.4 | length 2.6
  Bottom Layer w0.3: 22.972,16.175 23.056,16.175 23.523,16.642 C1.2 24.148,16.695 R11.1 ; R11.1@24.128,17.732 R11.1@24.148,17.752
NetC2_1: C2.1 L1.2 | length 0.9
  Bottom Layer w0.712: C2.1@15.552,16.387 L1.2@16.474,16.387
NetC2_2: C2.2 C7.2 L2.1 | length 2.3
  Bottom Layer w0.712: C7.2 14.004,15.931 cw(c14.46,15.931) C2.2@14.46,16.387 ; L2.1@14.005,14.33 C7.2
NetCON2_1: CON2.1 L1.1 U2.3 | length 4.5
  Bottom Layer w0.7: CON2.1@21.022,16.387 CON2.1
  Bottom Layer w0.712: L1.1@17.579,16.387 CON2.1@21.022,16.387 ; CON2.1 22.128,16.385
NetL4_1: L4.1 U3.A2 | length 1.4
  Bottom Layer w0.5: 23.8,5.554 23.8,5.148 24.24,4.708 L4.1
NetR1_2: R1.2 U1.H9 | length 1.6
  Bottom Layer w0.15: R1.2@18.5,8.7 19.2,8.7 19.28,8.78 U1.H9
NetR2_2: R2.2 U1.C5 U2.5 | length 9
  Top Layer w0.152: v1@21.92,11.7 v1(21.945,11.675) ; v1@21.98,11.6 v1@22,11.62 ; v1@22.08,11.7 v1@22,11.62 ; v1(24.127,14.851) 24.127,11.742 23.371,10.986 22.634,10.986 v1@22,11.62 ; v1(21.945,11.675) v1@22,11.62 ; v1(21.945,11.675) v1@22,11.62
  Bottom Layer w0.152: v1@21.97,11.65 v1(21.945,11.675) 21.92,11.7 22.02,11.6 22,11.58 22.07,11.51 U1.C5 ; U2.5 23.447,15.672 23.599,15.519 R2.2 ; R2.2@24.036,15.629 R2.2 ; v1(24.127,14.851) 24.127,15.501 R2.2
  Bottom Layer w0.2: v1@21.97,11.65 v1@22,11.62
NetR6_1: R6.1 U1.D4 | length 7.3
  Top Layer w0.15: v1(22.2,10.4) 23.209,10.4 24.448,11.639 24.448,12.648 24.947,13.147 v1(26.309,13.147)
  Bottom Layer w0.15: v1(22.2,10.4) 22.2,10.41 U1.D4 ; v1(26.309,13.147) v1@26.309,13.209 ; v1@26.316,13.216 v1@26.309,13.209 ; R6.1 26.2,13.1 v1@26.309,13.209
NetR12_1: R12.1 U3.B3 | length 1.2
  Bottom Layer w0.2: R12.1 24.07,6.82 24.2,6.69 U3.B3 ; R12.1@24.073,7.261 R12.1@24.207,7.261
NetTP1_0: TP1.0 U1.B1 | length 3.6
  Top Layer w0.152: v1(24.9,12.4) 25.54,11.76 TP1.0
  Bottom Layer w0.152: U1.B1 24.28,11.78 v1(24.9,12.4)
NetTP2_0: TP2.0 U1.A2 | length 4.6
  Top Layer w0.152: v1(24.59,13.576) 26.098,13.576 26.225,13.703 27.137,13.703 TP2.0
  Bottom Layer w0.152: U1.A2 23.922,12.632 23.922,12.873 v1@24.625,13.576 ; v1(24.59,13.576) v1@24.625,13.576 ; v1@24.752,13.703 v1@24.625,13.576
NetU1_A4: U1.A4 U2.6 | length 2.2
  Bottom Layer w0.712: 22.574,12.947 cw(c23.09,12.947) 22.725,13.312 ccw(c22.327,13.711) 22.89,13.711 22.89,15.05
NetU1_J7: U1.J7 X1.2 | length 1.2
  Bottom Layer w0.152: X1.2 20.9,7.14 20.9,7.8 21.07,7.97 U1.J7
NetU1_J8: U1.J8 X1.1 | length 1.8
  Bottom Layer w0.152: X1.1 19.48,7.38 19.9,7.8 20.3,7.8 20.57,8.07 U1.J8
RX: pad.5 R10.1 T1.3 | length 6.2
  Bottom Layer w0.2: T1.3@7.555,5 R10.1 9.4,5 9.7,4.7 9.7,2 pad.5@8.9,1.2
  Bottom Layer w0.3: T1.3 T1.3@7.555,5
RXD: R9.2 T1.4 TP3.0 U1.J4 | length 24.5
  Top Layer w0.152: v1(22.493,7.807) 23.507,7.807 25.57,9.87 TP3.0
  Top Layer w0.2: v1(9.2,4) 18.4,4 21.1,6.7 21.1,7.8 21.63,8.33 22.036,8.33 v1@22.505,7.862 ; v1@22.4,7.8 22.407,7.807 v1(22.493,7.807)
  Bottom Layer w0.152: v1@22.368,7.858 v1@22.412,7.813 ; v1@22.4,7.69 v1@22.39,7.7 ; v1@22.475,7.7 22.5,7.725 v1@22.493,7.732 ; v1(22.493,7.807) v1@22.493,7.803 ; U1.J4 22.57,7.97 v1@22.412,7.813 ; v1@22.39,7.7 22.345,7.745 v1@22.412,7.813 ; v1@22.39,7.7 v1@22.457,7.768 ; v1@22.412,7.813 22.456,7.769 v1@22.457,7.768 ; v1@22.457,7.768 v1@22.493,7.803 ; v1@22.457,7.768 v1@22.493,7.732 ; v1@22.493,7.732 v1@22.493,7.803
  Bottom Layer w0.2: T1.4 7.815,4 R9.2 v1(9.2,4)
SQI_CLK: U1.E1
SQI_CS: U1.D3
SQI_D0: U1.D1
SQI_D1: U1.C1
SQI_D2: U1.E3
SQI_D3: U1.F3
TX: pad.6 R8.1 T1.6 | length 3.7
  Bottom Layer w0.2: R8.1 5.805,3.695 T1.6 6.51,1.11 pad.6
TXD: R7.2 T1.1 TP4.0 U1.J5 | length 28.7
  Top Layer w0.152: v1@21.833,7.853 21.847,7.839 21.858,7.828 v1(21.864,7.828) 21.864,7.807 21.853,7.796 22.296,7.354 23.554,7.354 24.19,7.99 TP4.0
  Top Layer w0.2: v1(5.1,5.8) 7.4,3.5 18.5,3.5 21.5,6.5 21.5,7.6 v1@21.753,7.853 ; v1@21.767,7.839 v1@21.847,7.839
  Bottom Layer w0.152: v1(21.864,7.828) 21.864,7.914 21.853,7.925 21.839,7.939 22.07,8.17 U1.J5
  Bottom Layer w0.2: v1(5.1,5.8) 5.3,6 R7.2 6,5.9 6.51,5.39 T1.1
VBAT: C8.2 C12.2 C13.2 C16.2 pad.2 U3.A1
VBKP: pad.4 R1.1 | length 11.4
  Bottom Layer w0.2: pad.4@11.2,1.2 11.2,2.095 11.2,2.825 11.915,3.54 15.12,3.54 18.3,6.72 18.3,7.5 R1.1@18.5,7.7
VGPS_EN: R4.2 R5.2 U3.B1 | length 11
  Bottom Layer w0.152: R4.2@13.864,2.714 R4.2 14.71,2.71 15.237,3.237 15.246,3.237 18.043,6.034 R5.2 22.774,6.034 23.039,6.3 U3.B1
pads on no net: U1.A6 U1.C3 U1.C4 U1.C6 U1.D9 U1.E9 U1.F1 U1.F4 U1.F6 U1.F9 U1.G4 U1.G5 U1.G9 U1.J6

## Polygon pours and split planes (outlines as drawn)
GND on Bottom Layer "Bottom Layer-GND" (solid, remove dead copper, pour order 0): 0,20 28,20 28,0 0,0
GND on Top Layer "Top Layer-GND" (solid, remove dead copper, pour order 2): 0,20 28,20 28,0 0,0

## Keep-outs
Keep-Out Layer:
  lines w0.2: -0.1,0 ccw(c0,0) 0,-0.1 ; -0.1,0 ccw(c0,0) 0,-0.1 ; -0.1,0 -0.1,20 ; -0.1,20 cw(c0,20) 0,20.1 ; -0.1,20 cw(c0,20) 0,20.1 ; 0,-0.1 28,-0.1 ; 0,20.1 28,20.1 ; 28,-0.1 ccw(c28,0) 28.1,0 ; 28,-0.1 ccw(c28,0) 28.1,0 ; 28,20.1 cw(c28,20) 28.1,20 ; 28,20.1 cw(c28,20) 28.1,20 ; 28.1,0 28.1,20

## Other copper
Top Layer:
  pour cut-out: 10.504,8.193 cw(c14.012,8.193) 14.012,11.7 cw(c14.012,8.206) 17.506,8.206 cw(c13.999,8.206) 13.999,4.699 cw(c13.998,8.193)
Bottom Layer:
  region net NetC2_2: 14.235,16.743 ccw(c14.235,16.158) 13.65,16.158 13.65,15.921 14.203,16.085 14.36,16.681
  region net NetU1_A4: 22.421,12.274 22.233,12.849 22.233,13.037 22.923,13.034 22.916,12.851 22.719,12.274
  pour cut-out: 14.235,16.881 14.235,16.877 22.128,16.877 21.879,15.892 15.552,15.895 14.585,15.897
  pour cut-out: 14.498,13.23 14.497,13.231 14.497,15.797 13.512,15.797 13.513,15.796 13.513,13.23
  region net VBAT: 23.18,4.93 23.38,5.13 23.38,5.714 23.48,5.814 23.48,5.95 23.38,6.05 23.09,6.05 22.23,5.19 22.23,4.82 23.18,4.82
  pour cut-out: 24.59,3.343 25.49,3.343 25.49,5.17 24.59,5.17
  pour cut-out: 3.5,0 17,0 17,2 3.5,2
  region net +1.8V: 25,9.6 24.6,9.6 24.4,9.4 24.1,9.4 24.1,8.2 24.7,7.6 25.1,7.6 25.4,7.9 25.4,8.7 25,9.1
  region net VBAT: 16.5,1.9 16.5,2.6 17.92,4.02 23.18,4.02 23.18,5.6 18.06,5.6 14.7,2.24 14.7,1.9
  region net NetL4_1: 23.65,5.9 23.95,5.9 23.95,5.704 23.8,5.554 23.65,5.704
  region: 46.23,17.82

## Silkscreen, mask and mechanical layers (free items; w line width, h text height)
Top Overlay:
  text "Smartparks opencollar.io / Rhino tracker" at 4.29,0.43 h0.8 r90
Top Solder:
  lines w2: 5.41,3.51 5.41,1.48 22.53,1.48 22.53,5.07 ; 5.46,7.63 5.46,18.54 17.9,18.54 ; 20.98,18.5 22.48,17 22.48,13.15
Bottom Solder:
  rectangle: 0,-0.002 2.94,2.088
  rectangle: 0,16.86 12.768,20

## Dimensions
28,20 to 0,20 on Mechanical 16
28,0 to 28,20 on Mechanical 16